# Altium PCB SMA_Mezzanine.PcbDoc
Units mm, origin at the board's own origin, x right, y up, seen from the top; angles counter-clockwise.
Board outline 152 x 100 mm, 4 copper layers (L1, L2, L3, L4), stack 1.564 mm thick; 13 components, 9 nets, 68 pads, 503 vias.
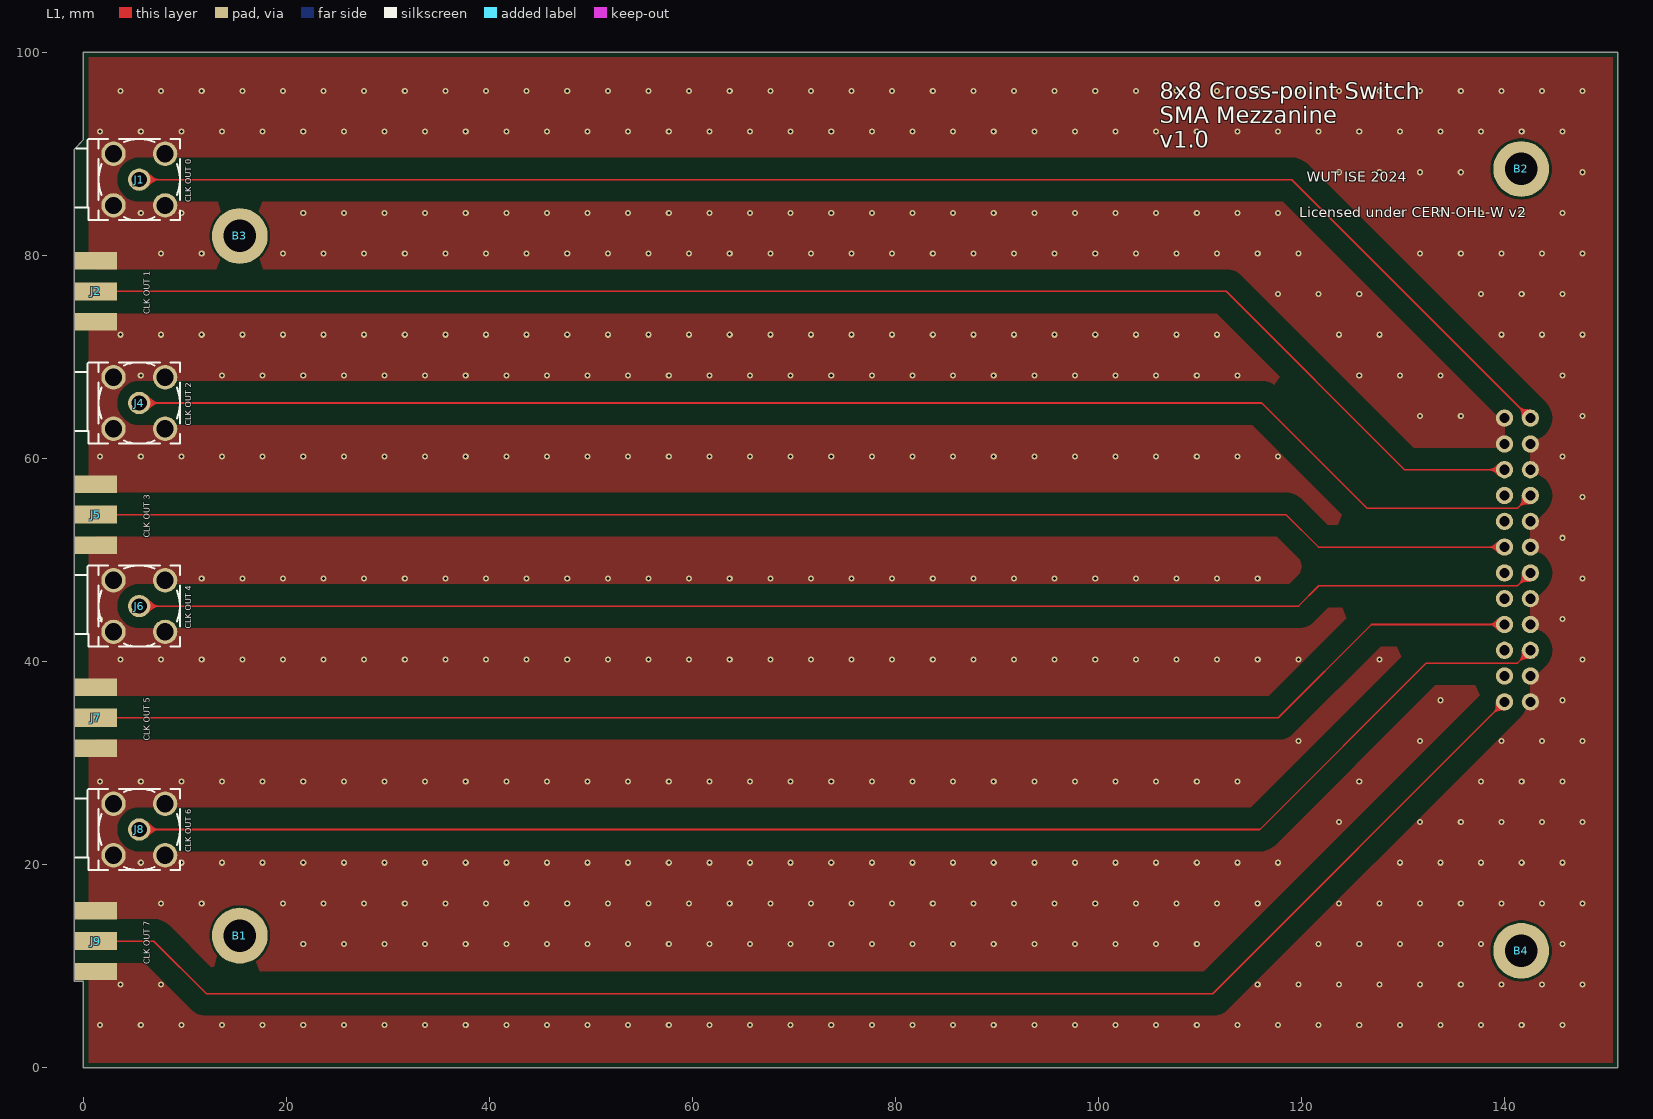
[diagram p0: L1 view]
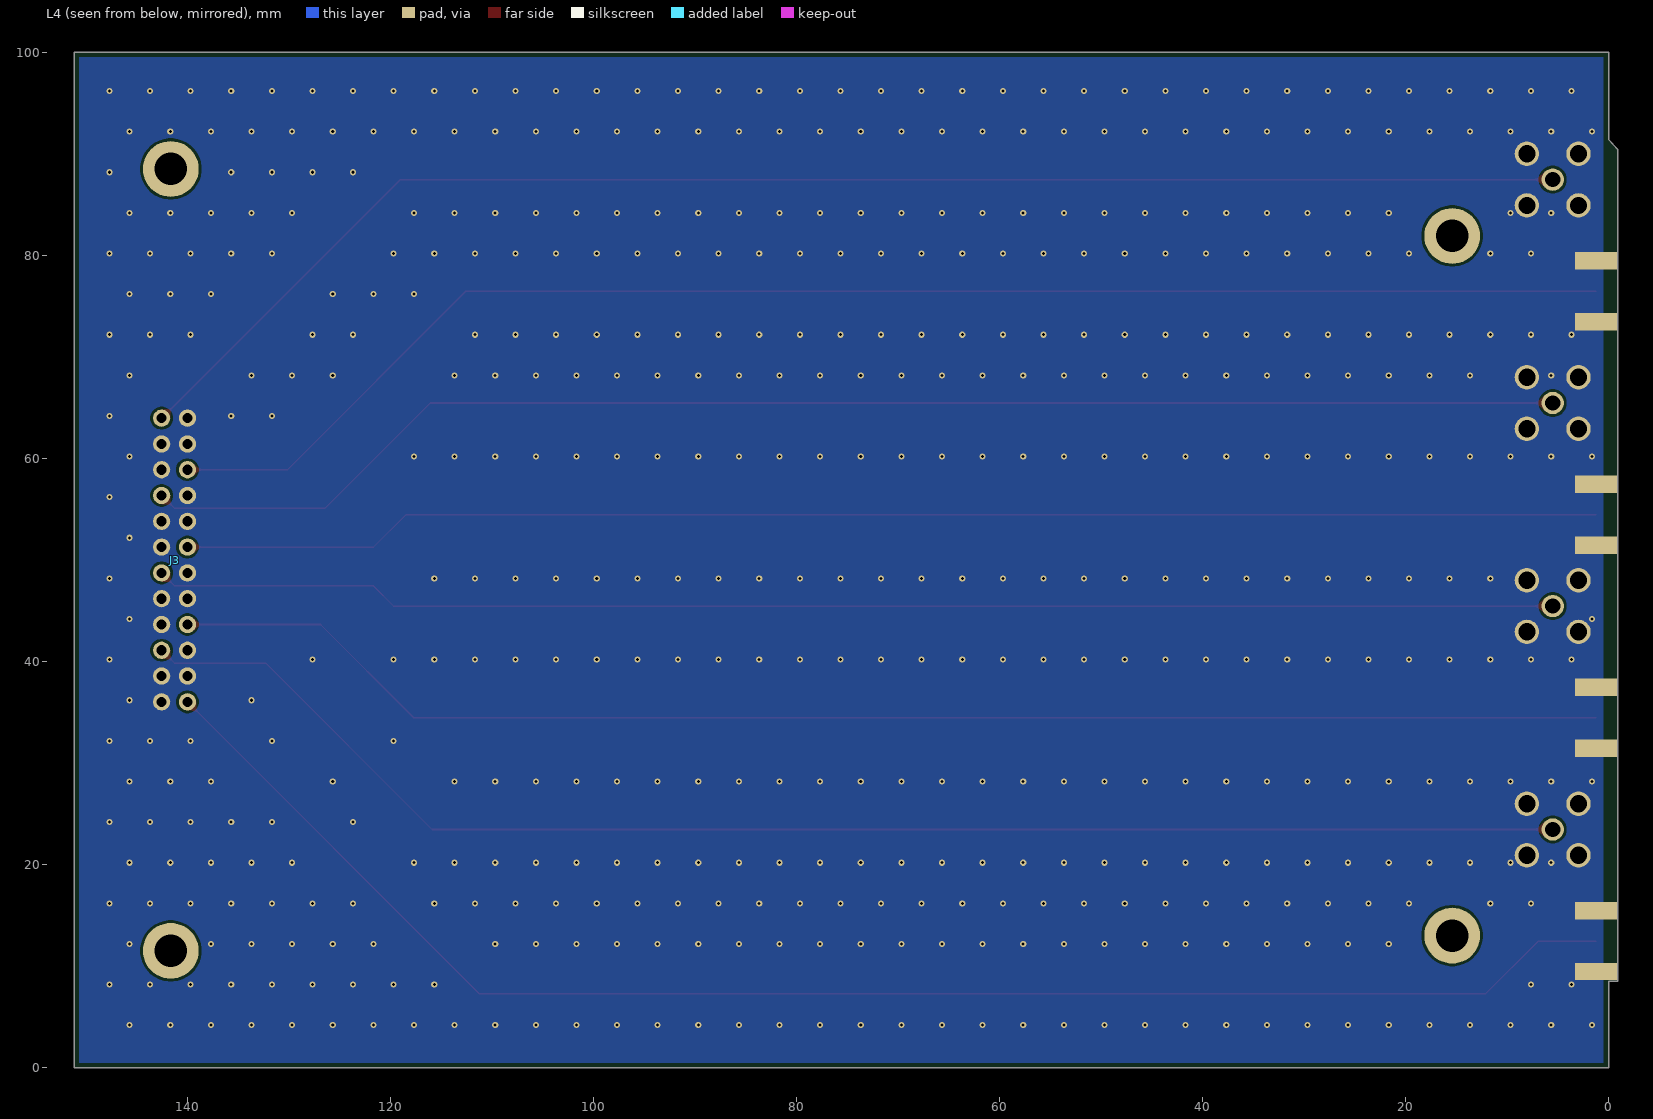
[diagram p1: L4 view, seen from below]
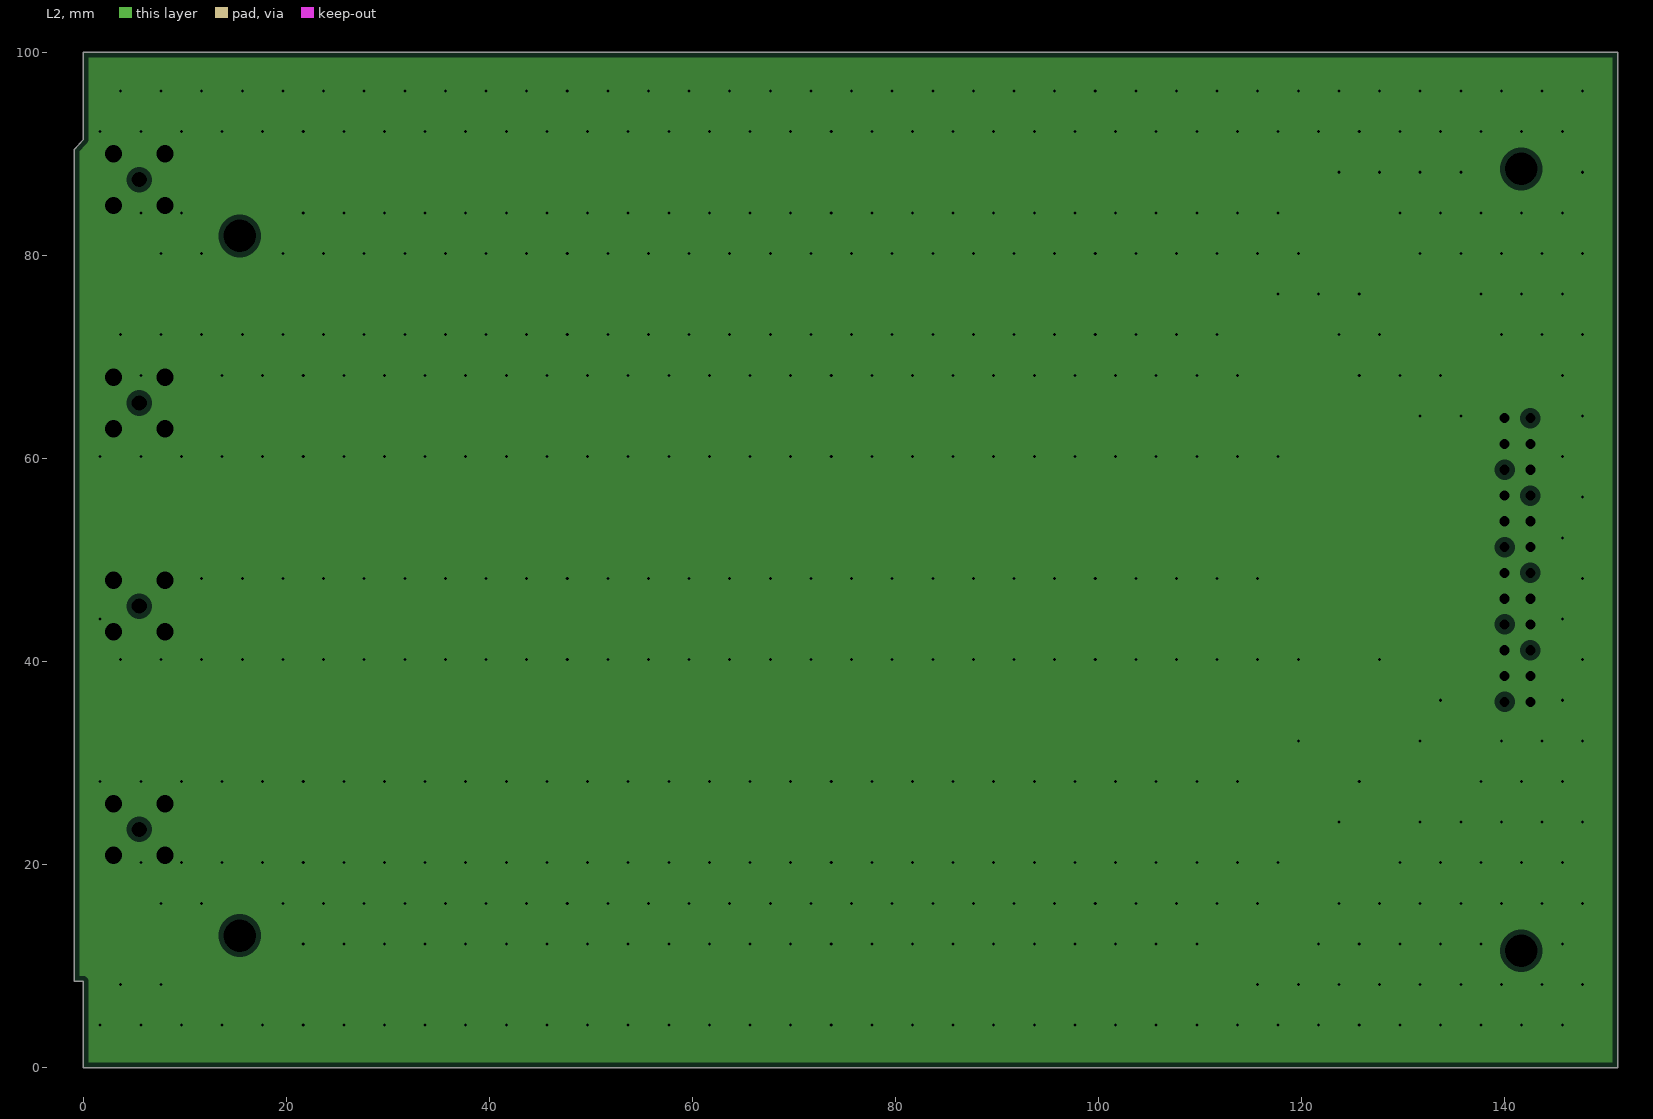
[diagram p2: L2, clearances drawn from the general rule]
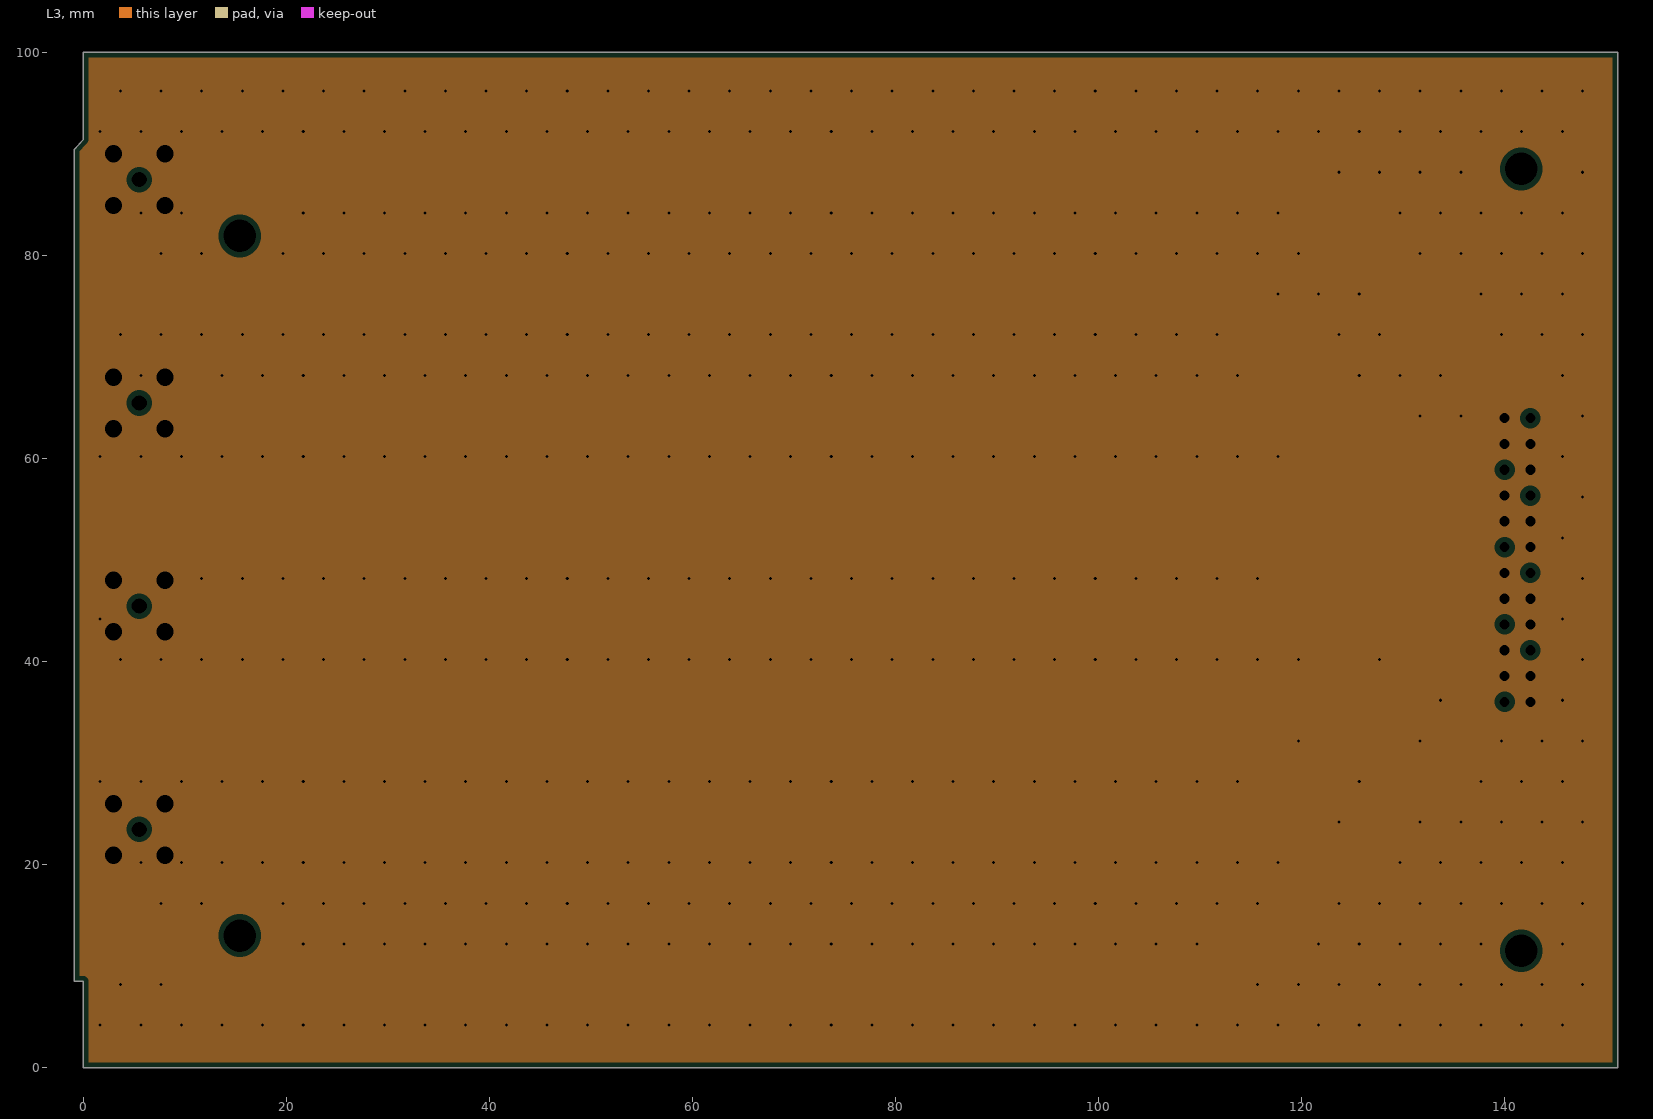
[diagram p3: L3, clearances drawn from the general rule]
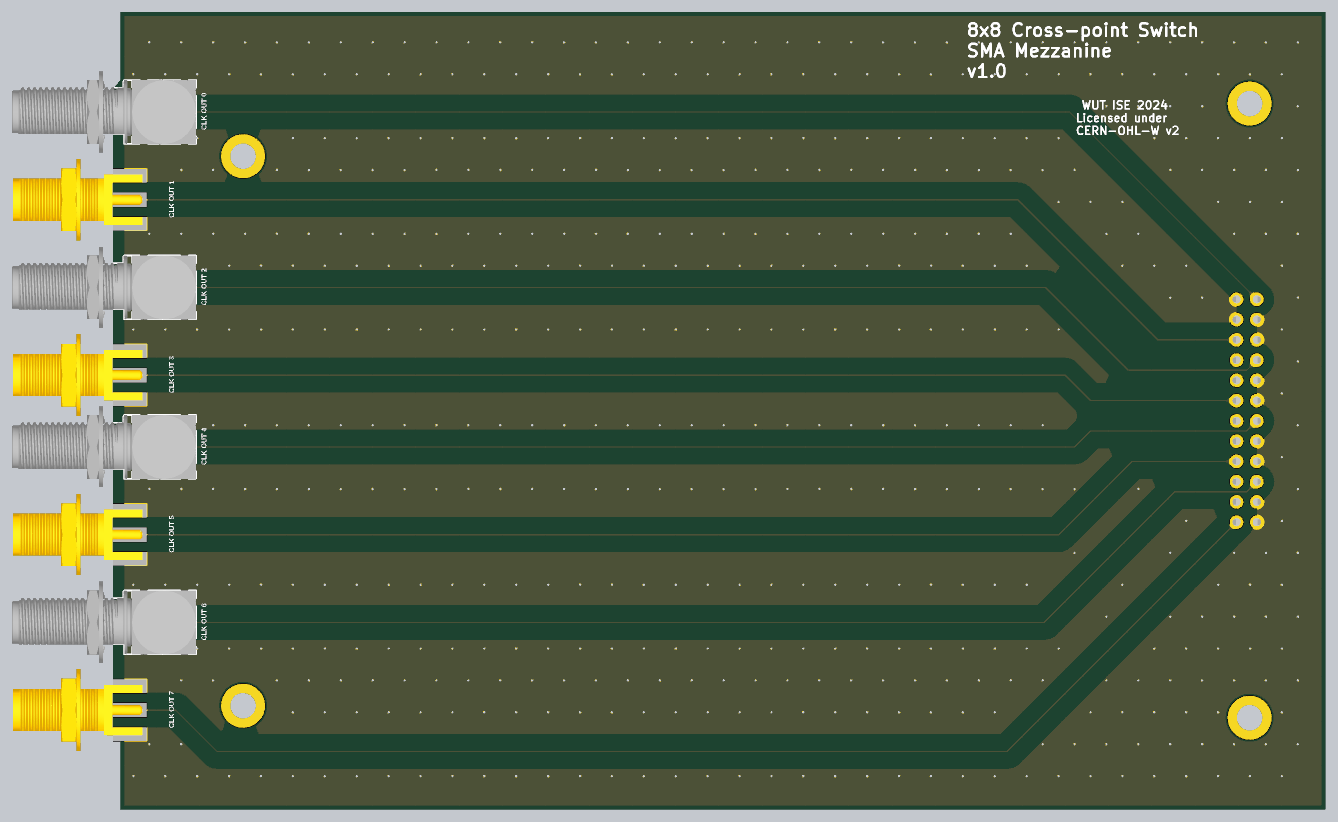
[diagram p4: 3D render of the assembled board from above, using the file's embedded part models]

## Layer stack, top to bottom
Top Solder: solder mask 0.01, Solder Resist, Dk 3.5
L1: signal copper 0.035
Dielectric 1: prepreg 0.0994, PP-006, Dk 4.1
L2: plane copper 0.0152, net GND
Dielectric 2: dielectric 1.265, FR-4, Dk 4.5
L3: plane copper 0.0152, net GND
Dielectric 3: prepreg 0.0994, PP-006, Dk 4.1
L4: signal copper 0.035
Bottom Solder: solder mask 0.01, Solder Resist, Dk 3.5

## Board outline
-0.9,8.512 -0.9,90.412 0,91.412 0,100 151.1,100 151.1,0 0,0 0,8.512

## Design rules (kind name [scope] priority, off if disabled: settings)
Clearance [InNetClass('S50')] p1: gap=0.254 ignorepadtopadclearanceinfootprint=FALSE except(1.25: SMDPad-Poly; 2.1: Track-Poly)
Clearance Clearance_holes [InComponent('B1') OR InComponent('B2')    OR InComponent('B3')    OR InComponent('B4')] p2: gap=0.254 ignorepadtopadclearanceinfootprint=FALSE except(0.15: Track-Poly; 0.5: SMDPad-Poly)
HoleSize [All] p1: absolutevalues=TRUE maxlimit=5 minlimit=0.025 maxpercent=80.000 minpercent=20.000
PlaneClearance [All] p1: clearance=0.508
PlaneConnect [All] p1: planeconnectstyle=Direct reliefexpansion=0.508 reliefentries=4 reliefconductorwidth=0.254 reliefairgap=0.254
PolygonConnect [All] p1: connectstyle=Direct reliefconductorwidth=0.254 reliefentries=4 polygonreliefangle="90 Angle" airgapwidth=0.254
RoutingVias [All] p1: holewidth=0.711 width=1.27 viastyle="Through Hole" minholewidth=0.711 minwidth=1.27 maxholewidth=0.711 maxwidth=1.27
SilkToSolderMaskClearance [IsPad] p1: minsilkscreentomaskgap=0.15 clearancetoexposedcopper=TRUE
SolderMaskExpansion [All] p1: expansion=0.102 istentingtop=FALSE
SupplyNets "Schematic Supply Nets" [InNet('GND')] p1: voltage=0.000
Width Width_S50 [InNetClass('S50')] p1: maxlimit=0.156 minlimit=0.156 preferedwidth=0.156 impedanceprofiledriven=TRUE impedanceprofileid={F754960B-3A38-4237-AB0E-608BC4C88582} impedanceprofilevalue=50.000000 minimp=50.000000 maximp=50.000000 favimp=50.000000
Width [All] p2: maxlimit=5 minlimit=0.1 preferedwidth=0.254
26 further rules are at their usual default settings.

## Classes and differential pairs
net class S50: CLK_OUT_0 CLK_OUT_1 CLK_OUT_2 CLK_OUT_3 CLK_OUT_4 CLK_OUT_5 CLK_OUT_6 CLK_OUT_7
net class CLK_OUT: CLK_OUT_0 CLK_OUT_1 CLK_OUT_2 CLK_OUT_3 CLK_OUT_4 CLK_OUT_5 CLK_OUT_6 CLK_OUT_7

## Components (designator, comment, footprint, x,y, rotation, side; value= is the part's Value field where it differs from the comment)
B1 "Plated Hole" MTG320_550 15.4,13.012 r0 top
B2 "Plated Hole" MTG320_550 141.6,88.512 r0 top
B3 "Plated Hole" MTG320_550 15.4,81.912 r0 top
B4 "Plated Hole" MTG320_550 141.6,11.512 r0 top
J1 "SMA" AMPHENOL_132203-12 5.5,87.462 r180 top
J2 "SMA" MOLEX_73251-2120 1.195,76.462 r0 top
J3 "1-534206-2" 1-534206-2 141.23,50 r90 bottom
J4 "SMA" AMPHENOL_132203-12 5.5,65.462 r180 top
J5 "SMA" MOLEX_73251-2120 1.195,54.462 r0 top
J6 "SMA" AMPHENOL_132203-12 5.5,45.462 r180 top
J7 "SMA" MOLEX_73251-2120 1.195,34.462 r0 top
J8 "SMA" AMPHENOL_132203-12 5.5,23.462 r180 top
J9 "SMA" MOLEX_73251-2120 1.195,12.462 r0 top

## Footprints (in the part's own frame and the unit in brackets; to place one, negate y for a bottom-side part, rotate by r counter-clockwise, add the part's x,y. Pads: shape width x height; smd on the part's side, far side on the other; paste and mask are expansions set on the pad)
1-534206-2 [mm] "24 Contacts - Straight .100\" x .100\""
  round 1.7 hole 1: 1(-13.97,-1.27) 2(-13.97,1.27) 3(-11.43,-1.27) 4(-11.43,1.27) 5(-8.89,-1.27) 6(-8.89,1.27) 7(-6.35,-1.27) 8(-6.35,1.27) 9(-3.81,-1.27) 10(-3.81,1.27) 11(-1.27,-1.27) 12(-1.27,1.27) 13(1.27,-1.27) 14(1.27,1.27) 15(3.81,-1.27) 16(3.81,1.27) 17(6.35,-1.27) 18(6.35,1.27) 19(8.89,-1.27) 20(8.89,1.27) 21(11.43,-1.27) 22(11.43,1.27) 23(13.97,-1.27) 24(13.97,1.27)
  body extent -15.24,-2.51 15.24,2.51, height 8.65
AMPHENOL_132203-12 [mm] "50 Ohm Through Hole SMA Right Angle PCB Jack"
  round 2.2 hole 1.5: 1(0,0)
  round 2.4 hole 1.7: 2(-2.54,2.54) 2(-2.54,-2.54) 2(2.54,2.54) 2(2.54,-2.54)
  silkscreen extent -4,-4 6.3,4, body extent -4,-5.1 19.05,5.1, height 11.45
MOLEX_73251-2120 [mm] "50 Ohm, SMA Edge Mount PCB, With Jam Nut And Lock Washer"
  rect 4.19x1.78 smd: 1(0,0)
  rect 4.19x1.7 smd: 2(0,-3) 2(0,3)
  rect 4.19x1.7 smd far side: 2(0,-3) 2(0,3)
  body extent -14.64,-5.13 1.62,5.13, height 5.76
MTG320_550 [mm] "Plated Through Hole: Hole Dia.=3.2mm Pad Dia.=5.5mm"
  round 5.5 hole 3.2: 1(0,0)

## Part data
B1 B2 B3 B4: library part PLATED_HOLE3.2_PAD5.5, "Single Terminal Socket", Author="CERN DEM JMW", Component Type="Standard (No BOM)", ComponentHeight=0mm, CreateDate=10/1/2012, Family="Plated Hole", HelpURL=Undefined, LatestRevisionDate=10/1/2012, Mounted=No, PackageDescription="Plated Through Hole: Hole Dia.=3.2mm Pad Dia.=5.5mm", Part Description="Plated Through Hole: Hole Dia.=3.2mm Pad Dia.=5.5mm", Part Number=PLATED_HOLE3.2_PAD5.5, Pin Count=1, Sense=No, SMD=No, Socket=No, Status=None
J1 J4 J6 J8: library part 132203-12, "RF Connector SMA Right Angle PCB Jack Through Hole 50 Ohm Bulkhead", Manufacturer="Amphenol Connex", Supplier Part Number=523-132203-12, Category="RF / Coaxial Connectors", ComponentLink1Description=https://datasheet.ciiva.com/24241/132203-12-customer-drawing-24241088.pdf?src-supplier=Mouser, ComponentLink1URL=https://datasheet.ciiva.com/24241/132203-12-customer-drawing-24241088.pdf?src-supplier=Mouser, ComponentLink2Description=https://datasheet.ciiva.com/647/132203-12-647032.pdf?src-supplier=Digikey, ComponentLink2URL=https://datasheet.ciiva.com/647/132203-12-647032.pdf?src-supplier=Digikey, Manufacturer Part Number=132203-12, Pricing="1=20.22, 10=18.65, 50=18.65, 100=18.65, 1000=18.65, 10000=18.65 (USD)", RoHS=Yes, Stock=515, Supplier=Mouser
J2 J5 J7 J9: library part CON_SMA_RA_SMD_73251-2120, "50 Ohm, SMA Edge Mount PCB, With Jam Nut And Lock Washer", Manufacturer=MOLEX, Manufacturer Part Number=73251-2120, Part Number=MOLEX_73251-2120, Author="CERN DEM JLC", Component Type=Standard, ComponentHeight=5.75mm, CreateDate=26.10.2016, Family=SMA, HelpURL=\\cern.ch\dfs\Applications\Altium\Datasheets\MOLEX_73251-2121.pdf, LatestRevisionDate=26.10.2016, Mounted=Yes, Part Description="50 Ohm, SMA Edge Mount PCB, With Jam Nut And Lock Washer", Pin Count=5, PressFit=No, Sense=No, SMD=Yes, Socket=No, Status=None
J3: "Conn Socket Strip SKT 24 POS 2.54mm Solder ST Thru-Hole Automotive Box/Tube", Contact Current Rating=2A, Contact Resistance=12MR, Flammability Rating="UL94 V-0", High Temperature Compatible=No, Housing Color=Black, Insulation Resistance=5GR, Manufacturer="TE Connectivity", Max Operating Temperature=105°C, Min Operating Temperature=-65°C, Package Quantity=18, Supplier Part Number=571-15342062, Voltage Rating=250V, Approvals=CSA, Boss="No (Without)", Category="Board to Board Connectors", ComponentLink1Description=https://datasheet.ciiva.com/743/eng-cd-534206-r7-743570.pdf?src-supplier=Digikey, ComponentLink1URL=https://datasheet.ciiva.com/743/eng-cd-534206-r7-743570.pdf?src-supplier=Digikey, Connector Type=Receptacle,Connector,Socket, Contact Finish - Mating=GOLD, Contact Material=Bronze, Contact Plating=Gold,Tin,Lead, Contact Post Length=2.92mm, Contact Shape=Square, Contact Type="Female Socket", Current Rating=2A, Depth=5.03mm, ELV=Non-Compliant, Fastening Type=Pull, GENDER=Female, Height=5.03mm, Housing Material=Polyester, Insulation Color=Black, Insulation Material=Glass, Lead Free="Contains Lead", Length=30.48mm, Manufacturer Part Number=1-534206-2, Mounting Technology="Through Hole", Number of Contacts=24, Number of Positions=24, Number of Rows=2, Orientation=Straight, Packaging=Rail/Tube, PCB Mount Retention=Without, PCB Mounting Orientation=Vertical, PCB Thickness=1.57mm, Pitch=2.54mm, Pricing="1=5.45, 10=5.44, 50=5.1, 100=5.1, 1000=4.71, 10000=4.71 (USD)", Radiation Hardening=No, RoHS=No, RoHS Compliant=No, Row Spacing=0.1inch, Sealable="No (Without)", Series="AMPMODU MOD II", Stackable=Yes, Stock=292, Supplier=Mouser, Tail Length=2.92mm, Termination=Solder

## Via types
v1: diameter 0.6, hole 0.3, L1 to L4, tented both sides, 503 vias

## Nets (pads, with @x,y where several pads share a name; then routed paths per layer and width w, separated by ;. In a path a pad name is that pad's centre, name@x,y a point inside that pad or via, vN(x,y) a via of type N, cw(c..) or ccw(c..) an arc to the next point about the centre after c; other vN are vias at no path point)
CLK_OUT_0: J1.1 J3.24 | length 146.7
  L1 w0.156: J1.1 119.008,87.462 J3.24
CLK_OUT_1: J2.1 J3.19 | length 146
  L1 w0.156: J2.1 112.538,76.462 130.11,58.89 J3.19
CLK_OUT_2: J3.18 J4.1 | length 141.8
  L1 w0.156: J4.1 116.038,65.462 126.41,55.09 141.24,55.09 J3.18
CLK_OUT_3: J3.13 J5.1 | length 140.1
  L1 w0.156: J5.1 118.438,54.462 121.63,51.27 J3.13
CLK_OUT_4: J3.12 J6.1 | length 138.4
  L1 w0.156: J6.1 119.662,45.462 121.67,47.47 141.24,47.47 J3.12
CLK_OUT_5: J3.7 J7.1 | length 142.6
  L1 w0.156: J7.1 117.662,34.462 126.85,43.65 J3.7
CLK_OUT_6: J3.6 J8.1 | length 144.3
  L1 w0.156: J8.1 115.862,23.462 132.25,39.85 141.24,39.85 J3.6
CLK_OUT_7: J3.1 J9.1 | length 152.8
  L1 w0.156: J9.1 6.937,12.462 12.109,7.29 111.22,7.29 J3.1
GND: J1.2 J2.2 J3.2 J3.3 J3.4 J3.5 J3.8 J3.9 J3.10 J3.11 J3.14 J3.15 J3.16 J3.17 J3.20 J3.21 J3.22 J3.23 J4.2 J5.2 J6.2 J7.2 J8.2 J9.2
  other v1: 1.647,4.187 5.647,4.187 9.647,4.187 13.647,4.187 17.647,4.187 21.647,4.187 25.647,4.187 29.647,4.187 33.647,4.187 37.647,4.187 41.647,4.187 45.647,4.187 49.647,4.187 53.647,4.187 57.647,4.187 61.647,4.187 65.647,4.187 69.647,4.187 73.647,4.187 77.647,4.187 81.647,4.187 85.647,4.187 89.647,4.187 93.647,4.187 97.647,4.187 101.647,4.187 105.647,4.187 109.647,4.187 113.647,4.187 117.647,4.187 121.647,4.187 125.647,4.187 129.647,4.187 133.647,4.187 137.647,4.187 141.647,4.187 145.647,4.187 3.647,8.187 7.647,8.187 115.647,8.187 119.647,8.187 123.647,8.187 127.647,8.187 131.647,8.187 135.647,8.187 139.647,8.187 143.647,8.187 147.647,8.187 21.647,12.187 25.647,12.187 29.647,12.187 33.647,12.187 37.647,12.187 41.647,12.187 45.647,12.187 49.647,12.187 53.647,12.187 57.647,12.187 61.647,12.187 65.647,12.187 69.647,12.187 73.647,12.187 77.647,12.187 81.647,12.187 85.647,12.187 89.647,12.187 93.647,12.187 97.647,12.187 101.647,12.187 105.647,12.187 109.647,12.187 121.647,12.187 125.647,12.187 129.647,12.187 133.647,12.187 137.647,12.187 145.647,12.187 7.647,16.187 11.647,16.187 19.647,16.187 23.647,16.187 27.647,16.187 31.647,16.187 35.647,16.187 39.647,16.187 43.647,16.187 47.647,16.187 51.647,16.187 55.647,16.187 59.647,16.187 63.647,16.187 67.647,16.187 71.647,16.187 75.647,16.187 79.647,16.187 83.647,16.187 87.647,16.187 91.647,16.187 95.647,16.187 99.647,16.187 103.647,16.187 107.647,16.187 111.647,16.187 115.647,16.187 123.647,16.187 127.647,16.187 131.647,16.187 135.647,16.187 139.647,16.187 143.647,16.187 147.647,16.187 5.647,20.187 9.647,20.187 13.647,20.187 17.647,20.187 21.647,20.187 25.647,20.187 29.647,20.187 33.647,20.187 37.647,20.187 41.647,20.187 45.647,20.187 49.647,20.187 53.647,20.187 57.647,20.187 61.647,20.187 65.647,20.187 69.647,20.187 73.647,20.187 77.647,20.187 81.647,20.187 85.647,20.187 89.647,20.187 93.647,20.187 97.647,20.187 101.647,20.187 105.647,20.187 109.647,20.187 113.647,20.187 117.647,20.187 129.647,20.187 133.647,20.187 137.647,20.187 141.647,20.187 145.647,20.187 123.647,24.187 131.647,24.187 135.647,24.187 139.647,24.187 143.647,24.187 147.647,24.187 1.647,28.187 5.647,28.187 9.647,28.187 13.647,28.187 17.647,28.187 21.647,28.187 25.647,28.187 29.647,28.187 33.647,28.187 37.647,28.187 41.647,28.187 45.647,28.187 49.647,28.187 53.647,28.187 57.647,28.187 61.647,28.187 65.647,28.187 69.647,28.187 73.647,28.187 77.647,28.187 81.647,28.187 85.647,28.187 89.647,28.187 93.647,28.187 97.647,28.187 101.647,28.187 105.647,28.187 109.647,28.187 113.647,28.187 125.647,28.187 137.647,28.187 141.647,28.187 145.647,28.187 119.647,32.187 131.647,32.187 139.647,32.187 143.647,32.187 147.647,32.187 133.647,36.187 145.647,36.187 3.647,40.187 7.647,40.187 11.647,40.187 15.647,40.187 19.647,40.187 23.647,40.187 27.647,40.187 31.647,40.187 35.647,40.187 39.647,40.187 43.647,40.187 47.647,40.187 51.647,40.187 55.647,40.187 59.647,40.187 63.647,40.187 67.647,40.187 71.647,40.187 75.647,40.187 79.647,40.187 83.647,40.187 87.647,40.187 91.647,40.187 95.647,40.187 99.647,40.187 103.647,40.187 107.647,40.187 111.647,40.187 115.647,40.187 119.647,40.187 127.647,40.187 147.647,40.187 1.647,44.187 145.647,44.187 11.647,48.187 15.647,48.187 19.647,48.187 23.647,48.187 27.647,48.187 31.647,48.187 35.647,48.187 39.647,48.187 43.647,48.187 47.647,48.187 51.647,48.187 55.647,48.187 59.647,48.187 63.647,48.187 67.647,48.187 71.647,48.187 75.647,48.187 79.647,48.187 83.647,48.187 87.647,48.187 91.647,48.187 95.647,48.187 99.647,48.187 103.647,48.187 107.647,48.187 111.647,48.187 115.647,48.187 147.647,48.187 145.647,52.187 147.647,56.187 1.647,60.187 5.647,60.187 9.647,60.187 13.647,60.187 17.647,60.187 21.647,60.187 25.647,60.187 29.647,60.187 33.647,60.187 37.647,60.187 41.647,60.187 45.647,60.187 49.647,60.187 53.647,60.187 57.647,60.187 61.647,60.187 65.647,60.187 69.647,60.187 73.647,60.187 77.647,60.187 81.647,60.187 85.647,60.187 89.647,60.187 93.647,60.187 97.647,60.187 101.647,60.187 105.647,60.187 109.647,60.187 113.647,60.187 117.647,60.187 145.647,60.187 131.647,64.187 135.647,64.187 147.647,64.187 5.647,68.187 13.647,68.187 17.647,68.187 21.647,68.187 25.647,68.187 29.647,68.187 33.647,68.187 37.647,68.187 41.647,68.187 45.647,68.187 49.647,68.187 53.647,68.187 57.647,68.187 61.647,68.187 65.647,68.187 69.647,68.187 73.647,68.187 77.647,68.187 81.647,68.187 85.647,68.187 89.647,68.187 93.647,68.187 97.647,68.187 101.647,68.187 105.647,68.187 109.647,68.187 113.647,68.187 125.647,68.187 129.647,68.187 133.647,68.187 145.647,68.187 3.647,72.187 7.647,72.187 11.647,72.187 15.647,72.187 19.647,72.187 23.647,72.187 27.647,72.187 31.647,72.187 35.647,72.187 39.647,72.187 43.647,72.187 47.647,72.187 51.647,72.187 55.647,72.187 59.647,72.187 63.647,72.187 67.647,72.187 71.647,72.187 75.647,72.187 79.647,72.187 83.647,72.187 87.647,72.187 91.647,72.187 95.647,72.187 99.647,72.187 103.647,72.187 107.647,72.187 111.647,72.187 123.647,72.187 127.647,72.187 139.647,72.187 143.647,72.187 147.647,72.187 117.647,76.187 121.647,76.187 125.647,76.187 137.647,76.187 141.647,76.187 145.647,76.187 7.647,80.187 11.647,80.187 19.647,80.187 23.647,80.187 27.647,80.187 31.647,80.187 35.647,80.187 39.647,80.187 43.647,80.187 47.647,80.187 51.647,80.187 55.647,80.187 59.647,80.187 63.647,80.187 67.647,80.187 71.647,80.187 75.647,80.187 79.647,80.187 83.647,80.187 87.647,80.187 91.647,80.187 95.647,80.187 99.647,80.187 103.647,80.187 107.647,80.187 111.647,80.187 115.647,80.187 119.647,80.187 131.647,80.187 135.647,80.187 139.647,80.187 143.647,80.187 147.647,80.187 5.647,84.187 9.647,84.187 21.647,84.187 25.647,84.187 29.647,84.187 33.647,84.187 37.647,84.187 41.647,84.187 45.647,84.187 49.647,84.187 53.647,84.187 57.647,84.187 61.647,84.187 65.647,84.187 69.647,84.187 73.647,84.187 77.647,84.187 81.647,84.187 85.647,84.187 89.647,84.187 93.647,84.187 97.647,84.187 101.647,84.187 105.647,84.187 109.647,84.187 113.647,84.187 117.647,84.187 129.647,84.187 133.647,84.187 137.647,84.187 141.647,84.187 145.647,84.187 123.647,88.187 127.647,88.187 131.647,88.187 135.647,88.187 147.647,88.187 1.647,92.187 5.647,92.187 9.647,92.187 13.647,92.187 17.647,92.187 21.647,92.187 25.647,92.187 29.647,92.187 33.647,92.187 37.647,92.187 41.647,92.187 45.647,92.187 49.647,92.187 53.647,92.187 57.647,92.187 61.647,92.187 65.647,92.187 69.647,92.187 73.647,92.187 77.647,92.187 81.647,92.187 85.647,92.187 89.647,92.187 93.647,92.187 97.647,92.187 101.647,92.187 105.647,92.187 109.647,92.187 113.647,92.187 117.647,92.187 121.647,92.187 125.647,92.187 129.647,92.187 133.647,92.187 137.647,92.187 141.647,92.187 145.647,92.187 3.647,96.187 7.647,96.187 11.647,96.187 15.647,96.187 19.647,96.187 23.647,96.187 27.647,96.187 31.647,96.187 35.647,96.187 39.647,96.187 43.647,96.187 47.647,96.187 51.647,96.187 55.647,96.187 59.647,96.187 63.647,96.187 67.647,96.187 71.647,96.187 75.647,96.187 79.647,96.187 83.647,96.187 87.647,96.187 91.647,96.187 95.647,96.187 99.647,96.187 103.647,96.187 107.647,96.187 111.647,96.187 115.647,96.187 119.647,96.187 123.647,96.187 127.647,96.187 131.647,96.187 135.647,96.187 139.647,96.187 143.647,96.187 147.647,96.187
pads on no net: B1.1 B2.1 B3.1 B4.1

## Polygon pours and split planes (outlines as drawn)
GND on L4 "GND_L04_P001" (solid, pour order 1): 0.5,0.5 0.5,99.5 150.6,99.5 150.6,0.5
GND on L1 "GND_L01_P000" (solid, pour order 0): 0.5,0.5 0.5,99.5 150.6,99.5 150.6,0.5
GND on L3 (split plane): 150.59,0.51 0.51,0.51 0.51,8.512 0.501,8.612 0.472,8.707 0.424,8.796 0.361,8.873 0.284,8.936 0.195,8.984 0.1,9.013 0,9.022 -0.39,9.022 -0.39,90.216 0.379,91.071 0.401,91.1 0.424,91.128 0.431,91.14 0.439,91.151 0.454,91.184 0.472,91.217 0.476,91.23 0.481,91.242 0.49,91.277 0.501,91.312 0.502,91.326 0.505,91.339 0.507,91.376 0.51,91.412 0.51,99.49 150.59,99.49
GND on L2 (split plane): 150.59,0.51 0.51,0.51 0.51,8.512 0.501,8.612 0.472,8.707 0.424,8.796 0.361,8.873 0.284,8.936 0.195,8.984 0.1,9.013 0,9.022 -0.39,9.022 -0.39,90.216 0.379,91.071 0.401,91.1 0.424,91.128 0.431,91.14 0.439,91.151 0.454,91.184 0.472,91.217 0.476,91.23 0.481,91.242 0.49,91.277 0.501,91.312 0.502,91.326 0.505,91.339 0.507,91.376 0.51,91.412 0.51,99.49 150.59,99.49

## Other copper
L1:
  pour cut-out: 139.96,63.97 142.5,63.97 142.5,36.03 139.96,36.03

## Silkscreen, mask and mechanical layers (free items; w line width, h text height)
Top Overlay:
  text "8x8 Cross-point Switch  / SMA Mezzanine / v1.0" at 106,90.595 h1.6
  text "WUT ISE 2024" at 120.475,87.27 h1.02
  text "CLK OUT 0" at 10.789,85.212 h1 r90
  text "Licensed under CERN-OHL-W v2" at 119.75,83.745 h1
  text "CLK OUT 1" at 6.734,74.212 h1 r90
  text "CLK OUT 2" at 10.789,63.212 h1 r90
  text "CLK OUT 3" at 6.734,52.212 h1 r90
  text "CLK OUT 4" at 10.789,43.212 h1 r90
  text "CLK OUT 5" at 6.734,32.212 h1 r90
  text "CLK OUT 6" at 10.789,21.212 h1 r90
  text "CLK OUT 7" at 6.734,10.212 h1 r90
Mechanical 1:
  the board outline again, w0.1